# Altium PCB MB1364.PcbDoc
Units mil, origin at the board's own origin, x right, y up, seen from the top; angles counter-clockwise.
Board outline 2755.91 x 5249.61 mil, 2 copper layers (Top Layer, Bottom Layer), stack 48.437 mil thick; 40 components, 158 nets, 301 pads, 101 vias.
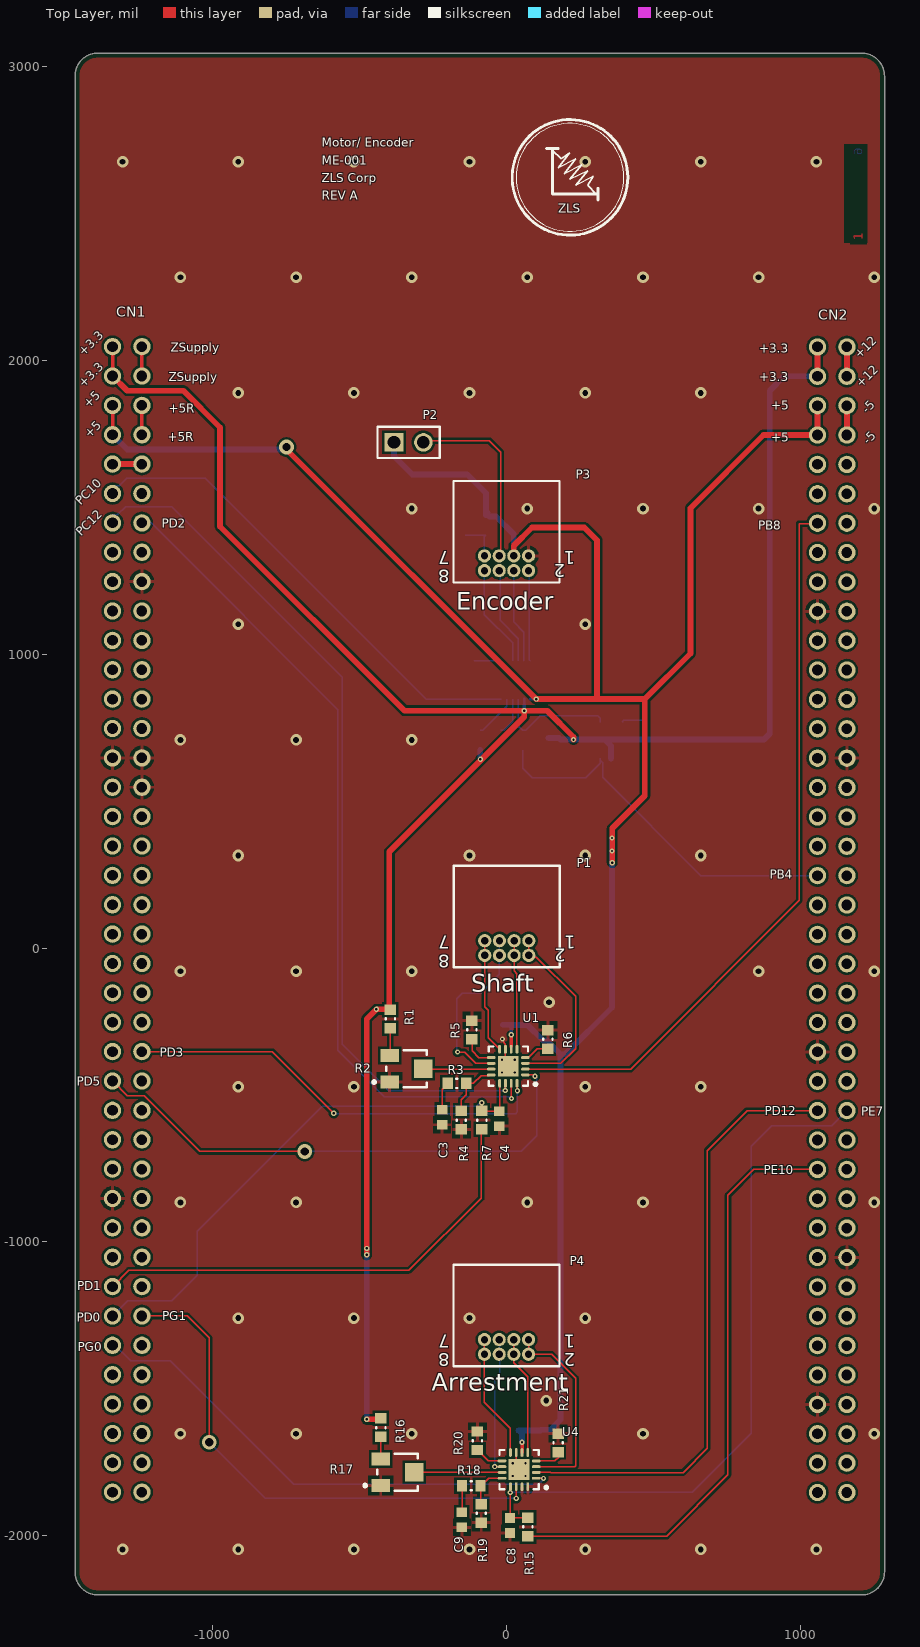
[diagram p0: Top Layer view]
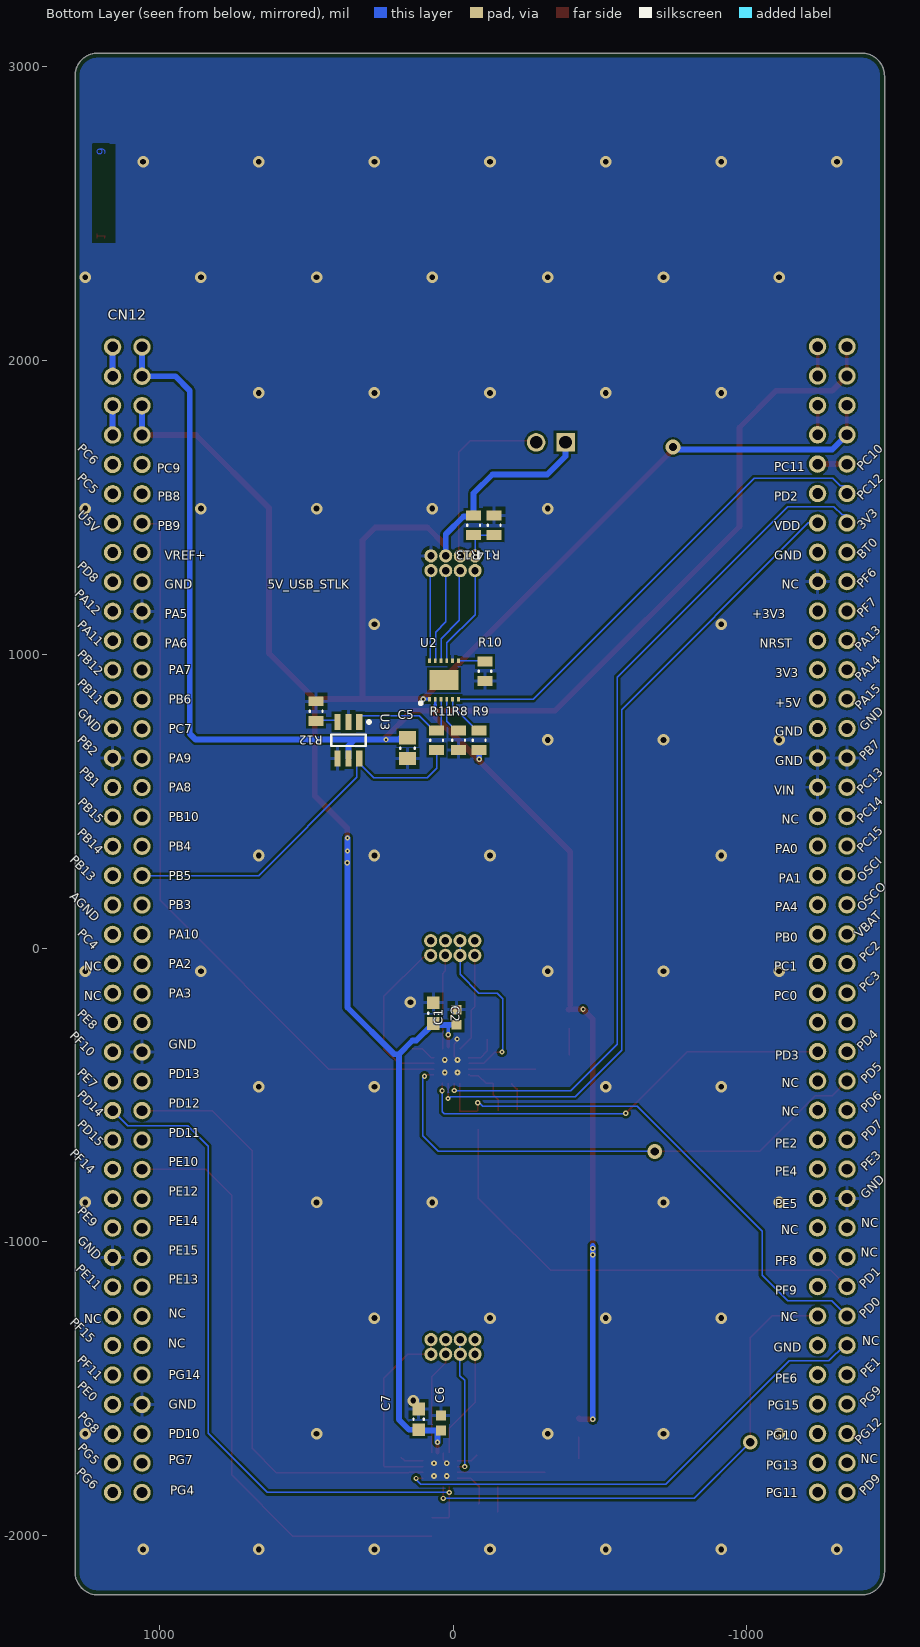
[diagram p1: Bottom Layer view, seen from below]

## Layer stack, top to bottom
Top Solder: solder mask 0.5909, Solder Resist, Dk 3.5
Top Layer: signal copper 1.6531
Dielectric 1: prepreg 3.9, FR-4, Dk 4.2
Dielectric 2: core 4, Dk 4.2
Dielectric 3: prepreg 37.2311, Dk 4.2
Bottom Layer: signal copper 1.6531
Bottom Solder: solder mask 0.5909, Solder Resist, Dk 3.5

## Board outline
-1469,-2123.26 ccw(c-1390.26,-2123.26) -1390.26,-2202 2.2,-2202 553.39,-2202 1208.16,-2202.01 ccw(c1208.16,-2123.26) 1286.9,-2123.26 1286.9,2968.87 ccw(c1208.16,2968.87) 1208.16,3047.61 -1390.26,3047.61 ccw(c-1390.26,2968.87) -1469,2968.87

## Design rules (kind name [scope] priority, off if disabled: settings)
BoardOutlineClearance [All] p1: gap=15.75 ignorepadtopadclearanceinfootprint=FALSE
Clearance [All] p1: gap=8 ignorepadtopadclearanceinfootprint=TRUE except(11.81: Arc-Fill Track-Fill SMDPad-Fill THPad-Fill Via-Fill Fill-Fill)
ComponentClearance [All] p1: gap=0 collisioncheckmode=3 verticalgap=0 showdistances=FALSE
FabricationTestPointUsage TestPointUsage [All] p1: valid=0 allowmultiple=FALSE
FabricationTestpoint Testpoint [(IsPad And (OnTopLayer Or OnBottomLayer))] p1: side=3 testpointundercomponent=TRUE minsize=40 maxsize=100 preferedsize=60 minholesize=0 maxholesize=40 preferedholesize=32 testpointgrid=1 allowsidetop=TRUE allowsidebottom=TRUE usegrid=TRUE gridtolerance=0.01
HoleSize [All] p1: absolutevalues=TRUE maxlimit=150 minlimit=1 maxpercent=80.000 minpercent=20.000
MinimumSolderMaskSliver [All] p1: minsoldermaskwidth=0
PolygonConnect PolygonConnect_10 [All vs IsNamedPolygon('USB_FS_VBUS_L01_P068')] p1: connectstyle=Direct reliefconductorwidth=10 reliefentries=4 polygonreliefangle="90 Angle" airgapwidth=10
PolygonConnect PolygonConnect_9 [All vs IsNamedPolygon('5V_L03_P060')] p2: connectstyle=Direct reliefconductorwidth=10 reliefentries=4 polygonreliefangle="90 Angle" airgapwidth=10
PolygonConnect PolygonConnect_8 [All vs IsNamedPolygon('5V_L01_P058')] p3: connectstyle=Direct reliefconductorwidth=10 reliefentries=4 polygonreliefangle="90 Angle" airgapwidth=10
PolygonConnect PolygonConnect_7 [All vs IsNamedPolygon('3V3_STLK_L04_P042')] p4: connectstyle=Direct reliefconductorwidth=10 reliefentries=4 polygonreliefangle="90 Angle" airgapwidth=10
PolygonConnect PolygonConnect_6 [All vs IsNamedPolygon('5V_USB_CHGR_L04_P040')] p5: connectstyle=Direct reliefconductorwidth=10 reliefentries=4 polygonreliefangle="90 Angle" airgapwidth=10
PolygonConnect PolygonConnect_5 [All vs IsNamedPolygon('5V_L01_P038')] p6: connectstyle=Direct reliefconductorwidth=10 reliefentries=4 polygonreliefangle="90 Angle" airgapwidth=10
PolygonConnect PolygonConnect_4 [All vs IsNamedPolygon('5V_L01_P038')] p7: thpad.connectstyle=Relief thpad.reliefconductorwidth=15.75 thpad.reliefentries=4 thpad.polygonreliefangle="90 Angle" thpad.airgapwidth=15.75 smdpad.connectstyle=Direct smdpad.reliefconductorwidth=10 smdpad.reliefentries=4 smdpad.polygonreliefangle="90 Angle" smdpad.airgapwidth=10 via.connectstyle=Direct via.reliefconductorwidth=10 via.reliefentries=4 via.polygonreliefangle="90 Angle" via.airgapwidth=10
PolygonConnect PolygonConnect_3 [All vs IsNamedPolygon('5V_VIN_L01_P028')] p8: connectstyle=Direct reliefconductorwidth=10 reliefentries=4 polygonreliefangle="90 Angle" airgapwidth=10
PolygonConnect PolygonConnect_2 [All vs IsNamedPolygon('3V3_L01_P026')] p9: connectstyle=Direct reliefconductorwidth=10 reliefentries=4 polygonreliefangle="90 Angle" airgapwidth=10
PolygonConnect PolygonConnect_1 [All vs IsNamedPolygon('GND_L01_P024')] p10: connectstyle=Direct reliefconductorwidth=10 reliefentries=4 polygonreliefangle="90 Angle" airgapwidth=10
PolygonConnect [All] p11: thpad.connectstyle=Relief thpad.reliefconductorwidth=11.81 thpad.reliefentries=4 thpad.polygonreliefangle="90 Angle" thpad.airgapwidth=11.81 smdpad.connectstyle=Relief smdpad.reliefconductorwidth=11.81 smdpad.reliefentries=4 smdpad.polygonreliefangle="90 Angle" smdpad.airgapwidth=11.81 via.connectstyle=Direct via.reliefconductorwidth=10 via.reliefentries=4 via.polygonreliefangle="90 Angle" via.airgapwidth=10
RoutingLayers RoutingLayers_USB_DIFF_90R [InDifferentialPairClass('DPC_USB_DIFF_90R')] p1: top layer_v5=TRUE bottom layer_v5=TRUE
RoutingLayers RoutingLayers_RXTX_DIFF_100R [InDifferentialPairClass('DPC_RXTX_DIFF_100R')] p2: top layer_v5=TRUE bottom layer_v5=TRUE
RoutingLayers RoutingLayers_RMII_SINGLE_50R [InNetClass('NC_RMII_SINGLE_50R')] p3: top layer_v5=TRUE bottom layer_v5=TRUE
RoutingVias RoutingVias_Default [All] p1: holewidth=7.87 width=17.72 viastyle="Through Hole" minholewidth=7.87 minwidth=17.72 maxholewidth=7.87 maxwidth=17.72
SilkToSilkClearance [All] p1: silktosilkclearance=4
SilkToSolderMaskClearance SilkscreenOverComponentPads [IsPad] p1: minsilkscreentomaskgap=4 clearancetoexposedcopper=TRUE
SolderMaskExpansion [All] p1: expansion=4
Width Width_RMII_SINGLE_50R [InNetClass('NC_RMII_SINGLE_50R')] p1: maxlimit=5 minlimit=5 preferedwidth=5 minimp=50.000000 maximp=50.000000 favimp=50.000000
Width Width_POWER_300u [InNetClass('NC_POWER_300u')] p2: maxlimit=393.7 minlimit=4.72 preferedwidth=11.81 minimp=50.000000 maximp=50.000000 favimp=50.000000
Width Width_GROUND [InNetClass('NC_GROUND')] p3: maxlimit=393.7 minlimit=4.72 preferedwidth=11.81 minimp=50.000000 maximp=50.000000 favimp=50.000000
Width Width_POWER_500u [InNetClass('NC_POWER_500u')] p4: maxlimit=393.7 minlimit=4.72 preferedwidth=19.68 minimp=50.000000 maximp=50.000000 favimp=50.000000
Width Width_POWER_SMPS [InNetClass('NC_POWER_SMPS')] p5: maxlimit=393.7 minlimit=4.72 preferedwidth=19.68 minimp=50.000000 maximp=50.000000 favimp=50.000000
Width Width_STLK_W200 [InNetClass('NC_STLK_W200-ISO200')] p6: maxlimit=393.7 minlimit=7.87 preferedwidth=7.87 minimp=50.000000 maximp=50.000000 favimp=50.000000
Width Width_USB_OPTION [InNetClass('NC_USB_DIFF_90R_OPTION')] p7: maxlimit=6.1 minlimit=6.1 preferedwidth=6.1 minimp=50.000000 maximp=50.000000 favimp=50.000000
Width [All] p8: maxlimit=393.7 minlimit=4.72 preferedwidth=4.72 minimp=50.000000 maximp=50.000000 favimp=50.000000
Width Width_RD_N [InNet('RD_N')] p9: maxlimit=4.33 minlimit=4.33 preferedwidth=4.33 minimp=50.000000 maximp=50.000000 favimp=50.000000
Width Width_TD_P [InNet('TD_P')] p10: maxlimit=4.33 minlimit=4.33 preferedwidth=4.33 minimp=50.000000 maximp=50.000000 favimp=50.000000
22 further rules are at their usual default settings.

## Classes and differential pairs
net class PH[0..1]: PH0 PH1
net class PG[0..15]: PG0 PG1 PG2 PG3 PG4 PG5 PG6 PG7 PG8 PG9 PG10 PG11 PG12 PG13 PG14 PG15
net class PF[0..15]: PF0 PF1 PF2 PF3 PF4 PF5 PF6 PF7 PF8 PF9 PF10 PF11 PF12 PF13 PF14 PF15
net class PE[0..15]: PE0 PE1 PE2 PE3 PE4 PE5 PE6 PE7 PE8 PE9 PE10 PE11 PE12 PE13 PE14 PE15
net class PD[0..15]: PD0 PD1 PD2 PD3 PD4 PD5 PD6 PD7 PD8 PD9 PD10 PD11 PD12 PD13 PD14 PD15
net class PC[0..15]: PC0 PC1 PC2 PC3 PC4 PC5 PC6 PC7 PC8 PC9 PC10 PC11 PC12 PC13 PC14 PC15
net class PB[0..15]: PB0 PB1 PB2 PB3 PB4 PB5 PB6 PB7 PB8 PB9 PB10 PB11 PB12 PB13 PB14 PB15
net class PA[0..15]: PA0 PA1 PA2 PA3 PA4 PA5 PA6 PA7 PA8 PA9 PA10 PA11 PA12 PA13 PA14 PA15
component class Motors: C1 C2 C3 C4 C6 C7 C8 C9 P1 P4 R1 R2 R3 R4 R5 R6 R7 R15 R16 R17 R18 R19 R20 R21 U1 U4
component class Connectors: CN1 CN2 HW1 HW2
component class Encoder: C5 P2 P3 R8 R9 R10 R11 R12 R13 R14 U2 U3

## Components (designator, comment, footprint, x,y, rotation, side; value= is the part's Value field where it differs from the comment)
C1 "0.1uF" CAPC1608X94X35LL15T15 -12,-235 r90 bottom
C2 "4.7uF" CAPC0603(1608)55_M 67,-221 r270 bottom
C3 "22nF" CAPC1608X94X35LL15T15 -219,-575.5 r270 top
C4 "0.1uF" CAPC1608X94X35LL15T15 -24,-580.5 r90 top
C5 "CAP CER 0.1UF 25V X7R 0805" CAPC0805(2012)145_N 155,681 r270 bottom
C6 "0.1uF" CAPC1608X94X35LL15T15 41,-1616 r90 bottom
C7 "4.7uF" CAPC0603(1608)55_M 117,-1604 r270 bottom
C8 "0.1uF" CAPC1608X94X35LL15T15 12,-1965 r90 top
C9 "22nF" CAPC1608X94X35LL15T15 -152,-1946 r270 top
CN1 "SSW-140-23-G-D" SSW-140-23-G-D -1291.2,97.96 r270 top locked
CN2 "SSW-140-23-G-D" SSW-140-23-G-D 1108.8,96.97 r270 top locked
P1 "SAMTEC-TFM-104-01-X-D-RAJ" SAMTEC-TFM-104-01-X-D-RA 1,153 r180 top locked
P2 "61300211121" 61300211121 -333,1722 r0 top
P3 "SAMTEC-TFM-104-01-X-D-RAJ" SAMTEC-TFM-104-01-X-D-RA 0,1463 r180 top locked
P4 "SAMTEC-TFM-104-01-X-D-RAJ" SAMTEC-TFM-104-01-X-D-RA 0,-1205 r180 top locked
R1 "0.1" RESC0603(1608)_N -395.5,-240.5 r90 top value="1020.00 Ohm"
R2 "3313J-1-503E" BOUR-3313J-1_V -340.5,-410.5 r0 top
R3 "1k" RESC0603(1608)_N -169,-460.5 r0 top value="1020.00 Ohm"
R4 "10k" RESC0603(1608)_N -154,-585.5 r90 top value="1020.00 Ohm"
R5 ".2" RESC0603(1608)_N -118,-278 r270 top value="1020.00 Ohm"
R6 ".2" RESC0603(1608)_N 141,-310.5 r270 top value="1020.00 Ohm"
R7 "0.1" RESC0603(1608)_N -84,-585.5 r270 top value="1020.00 Ohm"
R8 "10K" RESC0805(2012)_L -19,708 r270 bottom
R9 "10K" RESC0805(2012)_L -89,708 r270 bottom
R10 "10K" RESC0805(2012)_L -109,943 r270 bottom
R11 "DNP" RESC0805(2012)_L 56,708 r270 bottom
R12 "43.2K" RESC0805(2012)_L 466,807 r90 bottom
R13 "DNP" RESC0805(2012)_L -70,1440 r270 bottom
R14 "DNP" RESC0805(2012)_L -140,1440 r270 bottom
R15 "0.1" RESC0603(1608)_N 73,-1970 r270 top value="1020.00 Ohm"
R16 "0.1" RESC0603(1608)_N -428,-1632 r90 top value="1020.00 Ohm"
R17 "3313J-1-503E" BOUR-3313J-1_V -371,-1784 r0 top
R18 "1k" RESC0603(1608)_N -120,-1830 r0 top value="1020.00 Ohm"
R19 "10k" RESC0603(1608)_N -86,-1924 r90 top value="1020.00 Ohm"
R20 ".2" RESC0603(1608)_N -99,-1677 r270 top value="1020.00 Ohm"
R21 ".2" RESC0603(1608)_N 176,-1684 r270 top value="1020.00 Ohm"
U1 "STSPIN220" STSPIN220-QFN127P600-8N 6.16,-401.84 r180 top
U2 "MAX22502EATC+T" MAX22502EATC+T 31,913 r90 bottom
U3 "LTC6994MPS6-2#TRMPBF" LTC6994MPS6-2#TRMPBF 356,708 r270 bottom locked
U4 "STSPIN220" STSPIN220-QFN127P600-8N 43,-1775 r180 top

## Footprints (in the part's own frame and the unit in brackets; to place one, negate y for a bottom-side part, rotate by r counter-clockwise, add the part's x,y. Pads: shape width x height; smd on the part's side, far side on the other; paste and mask are expansions set on the pad)
61300211121 [mm] "Pin Header, pitch 2.54 mm, THT, Vertical, single row, 2p"
  rect 1.6x1.6 hole 1.1: 1(-1.27,0)
  round 1.6 hole 1.1: 2(1.27,0)
  silkscreen extent -2.69,-1.35 2.69,1.35, body extent -2.54,-1.27 2.54,1.27, height 8.57
BOUR-3313J-1_V [mm] "SMD, 3-Leads, Body 3.5x3.2mm, Pitch 1.15mm"
  rect 1.6x1.1 smd paste+0: 1(-1.45,-1.15) 3(-1.45,1.15)
  rect 1.6x1.6 smd paste+0: 2(1.45,0)
  silkscreen extent -2.92,-1.6 1.75,1.6, body extent -1.75,-1.65 1.75,1.65, height 2.11
CAPC0603(1608)55_M [mm] "Chip Capacitor, Body 1.6x0.8mm, Height 0.55mm, IPC Low Density"
  rect 1.1x1.1 smd: 1(-0.9,0) 2(0.9,0)
  silkscreen extent -0.05,-0.45 0.05,0.45, body extent -0.87,-0.47 0.88,0.48, height 0.55
CAPC0805(2012)145_N [mm] "Chip Capacitor, Body 2.0x1.2mm, Height 1.45mm, IPC Medium Density"
  rect 1.15x1.45 smd: 1(-0.9,0) 2(0.9,0)
  silkscreen extent -0.05,-0.62 0.05,0.63, body extent -1.1,-0.72 1.1,0.73, height 1.45
CAPC1608X94X35LL15T15 [mm]
  rect 0.85x0.9 smd: 1(-0.65,0) 2(0.65,0)
  body extent -0.88,-0.48 0.87,0.48, height 0.94
LTC6994MPS6-2#TRMPBF [mm] "SOT23, 6-Leads, Body 2.90x3.23mm, Pitch 0.95mm, IPC Medium Density"
  rect 1.4x0.55 smd: 1(-1.575,0.95) 2(-1.575,0) 3(-1.575,-0.95) 4(1.575,-0.95) 5(1.575,0) 6(1.575,0.95)
  silkscreen extent -1.7,-1.5 0.5,1.9, body extent -1.92,-1.5 1.93,1.5, height 1
MAX22502EATC+T [mm]
  rect 0.4x0.25 smd: 1(-1.65,1.25) 2(-1.65,0.75) 3(-1.65,0.25) 4(-1.65,-0.25) 5(-1.65,-0.75) 6(-1.65,-1.25) 7(1.65,-1.25) 8(1.65,-0.75) 9(1.65,-0.25) 10(1.65,0.25) 11(1.65,0.75) 12(1.65,1.25)
  rect 1.7x2.5 smd: 13(0,0)
  silkscreen extent -2.12,1.88 -1.88,2.12, body extent -1.6,-1.55 1.6,1.55, height 0.8
RESC0603(1608)_N [mm] "Chip Resistor, Body 1.6x0.8mm, IPC Medium Density"
  rect 0.9x1 smd: 1(-0.8,0) 2(0.8,0)
  silkscreen extent -0.05,-0.4 0.05,0.4, body extent -0.85,-0.47 0.85,0.47, height 0.6
RESC0805(2012)_L [mm] "Chip Resistor, Body 2.0x1.3mm, IPC High Density"
  rect 0.85x1.3 smd: 1(-0.85,0) 2(0.85,0)
  silkscreen extent -0.05,-0.55 0.05,0.55, body extent -1.1,-0.67 1.1,0.68, height 0.7
SAMTEC-TFM-104-01-X-D-RA [mil]
  round 45 hole 25: 1(-75,127.48) 2(-75,177.48) 3(-25,127.48) 4(-25,177.48) 5(25,127.48) 6(25,177.48) 7(75,127.48) 8(75,177.48)
  silkscreen extent -180,-128 180,218, body extent -165,-110 160,177, height 222
SSW-140-23-G-D [mm]
  round 1.5 hole 0.92: 1(-49.53,-1.27) 2(-49.53,1.27) 3(-46.99,-1.27) 4(-46.99,1.27) 5(-44.45,-1.27) 6(-44.45,1.27) 7(-41.91,-1.27) 8(-41.91,1.27) 9(-39.37,-1.27) 10(-39.37,1.27) 11(-36.83,-1.27) 12(-36.83,1.27) 13(-34.29,-1.27) 14(-34.29,1.27) 15(-31.75,-1.27) 16(-31.75,1.27) 17(-29.21,-1.27) 18(-29.21,1.27) 19(-26.67,-1.27) 20(-26.67,1.27) 21(-24.13,-1.27) 22(-24.13,1.27) 23(-21.59,-1.27) 24(-21.59,1.27) 25(-19.05,-1.27) 26(-19.05,1.27) 27(-16.51,-1.27) 28(-16.51,1.27) 29(-13.97,-1.27) 30(-13.97,1.27) 31(-11.43,-1.27) 32(-11.43,1.27) 33(-8.89,-1.27) 34(-8.89,1.27) 35(-6.35,-1.27) 36(-6.35,1.27) 37(-3.81,-1.27) 38(-3.81,1.27) 39(-1.27,-1.27) 40(-1.27,1.27) 41(1.27,-1.27) 42(1.27,1.27) 43(3.81,-1.27) 44(3.81,1.27) 45(6.35,-1.27) 46(6.35,1.27) 47(8.89,-1.27) 48(8.89,1.27) 49(11.43,-1.27) 50(11.43,1.27) 51(13.97,-1.27) 52(13.97,1.27) 53(16.51,-1.27) 54(16.51,1.27) 55(19.05,-1.27) 56(19.05,1.27) 57(21.59,-1.27) 58(21.59,1.27) 59(24.13,-1.27) 60(24.13,1.27) 61(26.67,-1.27) 62(26.67,1.27) 63(29.21,-1.27) 64(29.21,1.27) 65(31.75,-1.27) 66(31.75,1.27) 67(34.29,-1.27) 68(34.29,1.27) 69(36.83,-1.27) 70(36.83,1.27) 71(39.37,-1.27) 72(39.37,1.27) 73(41.91,-1.27) 74(41.91,1.27) 75(44.45,-1.27) 76(44.45,1.27) 77(46.99,-1.27) 78(46.99,1.27) 79(49.53,-1.27) 80(49.53,1.27)
  body extent -51.05,-2.48 51.05,2.48, height 8.51
STSPIN220-QFN127P600-8N [mm]
  oval 0.75x0.25 smd: 1(-1.475,0.75) 2(-1.475,0.25) 3(-1.475,-0.25) 4(-1.475,-0.75) 9(1.475,-0.75) 10(1.475,-0.25) 11(1.475,0.25) 12(1.475,0.75)
  oval 0.25x0.75 smd: 5(-0.75,-1.475) 6(-0.25,-1.475) 7(0.25,-1.475) 8(0.75,-1.475) 13(0.75,1.475) 14(0.25,1.475) 15(-0.25,1.475) 16(-0.75,1.475)
  rect 1.8x1.8 smd: 17(0,0)
  silkscreen extent -2.48,-1.7 1.7,1.7, body extent -1.6,-1.6 1.6,1.6, height 1

## Part data
C1 C3 C4 C6 C8 C9: library part CMP-1661-00001-2, "CAP .1UF 16V CERAMIC X7R 0603", Capacitance=1uF, Case/Package=0603, Case Code (Metric)=1608, Dielectric=X7R, Manufacturer=Yageo, Manufacturer Part Number=CC0603KRX7R7BB105, Max Operating Temperature=125°C, Min Operating Temperature=-55°C, Package Quantity=1, Supplier Part Number 1=311-1446-6-ND, Tolerance=10%, Voltage=16V, Case Code (Imperial)=0603, ComponentLink1Description=Datasheet, ComponentLink1URL=http://datasheets.avx.com/X7RDielectric.pdf, ComponentLink2Description=http://www.yageo.com/documents/recent/UPY-GPHC_X7R_6.3V-to-50V_18.pdf, ComponentLink2URL=http://www.yageo.com/documents/recent/UPY-GPHC_X7R_6.3V-to-50V_18.pdf, ComponentLink3Description=http://www.yageo.com/documents/recent/UPY-GPHC_X7R_6.3V-to-50V_8.pdf, ComponentLink3URL=http://www.yageo.com/documents/recent/UPY-GPHC_X7R_6.3V-to-50V_8.pdf, ComponentLink4Description=http://www.farnell.com/datasheets/1734573.pdf, ComponentLink4URL=http://www.farnell.com/datasheets/1734573.pdf, ComponentLink5Description=http://www.farnell.com/datasheets/1489800.pdf, ComponentLink5URL=http://www.farnell.com/datasheets/1489800.pdf, Composition=Ceramic, Depth=0.8mm, Dissipation Factor=5%, Halogen Free="Halogen Free", Height=0.8mm, Lead Free="Lead Free", Length=1.6mm, Mount="Surface Mount", Number of Pins=2, Packaging="Tape and Reel", Pricing 1="1=0.21, 10=0.143, 100=0.0727, 500=0.04974, 1000=0.044 (USD)", Radiation Hardening=No, REACH SVHC=Unknown, Stock 1=5506121, Supplier 1=Digi-Key, Termination=SMD/SMT, Thickness=0.035inch, Voltage Rating=16V, Voltage Rating (DC)=16V, Width=0.031inch
C2 C7: library part CMP-1035-02779-1, "CAP 4.7uF 6.3V ±10% 0603 (1608 Metric) Thickness 0.55mm SMD", Case-EIA=0603, Case-Metric=1608, Dielectric=X5R, Dielectric Material=Ceramic, Manufacturer=KEMET, Manufacturer Part Number=C0603C475K9PACTU, Max Operating Temperature=85°C, Min Operating Temperature=-55°C, Package Quantity=1, Rated Voltage="6.3 V", Supplier Part Number 1=399-3482-6-ND, Tolerance=±10%, Voltage=6.3V, Capacitance=4.7uF, Case/Package=0603, Case Code (Imperial)=0603, Case Code (Metric)=1608, ComponentLink1Description=https://api.kemet.com/component-edge/download/datasheet/C0603C475K9PACTU.pdf, ComponentLink1URL=https://api.kemet.com/component-edge/download/datasheet/C0603C475K9PACTU.pdf, ComponentLink2Description=http://www.farnell.com/datasheets/1732700.pdf, ComponentLink2URL=http://www.farnell.com/datasheets/1732700.pdf, ComponentLink3Description=http://www.farnell.com/datasheets/1789732.pdf, ComponentLink3URL=http://www.farnell.com/datasheets/1789732.pdf, ComponentLink4Description=http://www.farnell.com/datasheets/40889.pdf, ComponentLink4URL=http://www.farnell.com/datasheets/40889.pdf, Contact Plating=Matte,Tin, Depth=0.8mm, Dissipation Factor=5%, Height=0.8mm, Lead Free="Lead Free", Lead Pitch=0.7mm, Length=1.6mm, Max Thickness="0.55 mm", Mount="PCB,Surface Mount", Number of Pins=2, Packaging="Tape and Reel", Pricing 1="1=0.21, 10=0.15, 100=0.0706, 500=0.04952, 1000=0.041 (USD)", Radiation Hardening=No, REACH SVHC="No SVHC", Stock 1=1765509, Supplier 1=Digi-Key, Technology=SMT, Termination=SMD/SMT, Thickness=0.035inch, Voltage Rating=6.3V, Voltage Rating (DC)=6.3V, Width=0.031inch
C5: library part CMP-1036-04795-1, Capacitance=0.1µF, Manufacturer="Murata Electronics North America", Manufacturer Part Number=GRM21BR71E104KA01L, Operating Temperature="-55°C ~ 125°C", Package / Case="0805 (2012 Metric)", Ratings=-, Supplier Part Number 1=490-1673-6-ND, Temperature Coefficient=X7R, Tolerance=±10%, Voltage - Rated=25V, Applications="General Purpose", Category=Capacitors, ComponentLink1Description=http://www.murata.com/~/media/webrenewal/support/library/catalog/products/capacitor/mlcc/c02e.ashx, ComponentLink1URL=http://www.murata.com/~/media/webrenewal/support/library/catalog/products/capacitor/mlcc/c02e.ashx, Features=-, Height - Seated (Max)=-, Lead Spacing=-, Lead Style=-, Mounting Type="Surface Mount, MLCC", Packaging=Digi-Reel®, Part Status=Active, Pricing 1="1=0.2, 10=0.145, 100=0.0683, 500=0.04788, 1000=0.03964 (USD)", RoHS="RoHS Compliant", Size / Dimension="0.079\" L x 0.049\" W (2.00mm x 1.25mm)", Stock 1=891652, Supplier 1=Digi-Key, Thickness (Max)="0.053\" (1.35mm)"
CN1 CN2: "80 Position Receptacle Connector Through Hole", Manufacturer=Samtec, ComponentLink1Description=http://www.samtec.com/documents/webfiles/pdf/SSQ_TH.PDF?src-supplier=Avnet, ComponentLink1URL=http://www.samtec.com/documents/webfiles/pdf/SSQ_TH.PDF?src-supplier=Avnet, Contact Plating=Gold, Gender=Female, Manufacturer Part Number=SSW-140-23-G-D, Mount="Through Hole", Number of Contacts=80, Number of Rows=2, Packaging=Bulk, Pitch=2.54mm, Pricing 1="1=13.99000, 10=13.29000, 25=12.59000, 50=12.09000, 100=11.29000 (USD)", Radiation Hardening=No, RoHS=Yes, Stock 1=0, Supplier 1=Avnet, Supplier Part Number 1=SSW-140-23-G-D, Termination=Solder
P2: library part CMP-1502-01060-1, "THT Vertical Pin Header WR-PHD, Pitch 2.54 mm, Single Row, 2 pins", Contact Resistance=20mOhm, Manufacturer="Wurth Elektronik", Operating Temperature=-40to105degC, Rated Current=3A, Withstanding Voltage=500VAC, Working Voltage=250VAC, Datasheet URL=https://katalog.we-online.de/em/datasheet/6130xx11121.pdf, Gender=Male, Manufacturer URL=http://www.we-online.de, Mounting Technology=THT, Orientation=Vertical, Package Reference=61300211121, Packaging=Bag, Part Number=61300211121, Pin Number=2, Pitch=2.54mm, Publisher=WurthElektronik, Row Number=Single
R1 R3 R4 R5 R6 R7 R15 R16 R18 R19 R20 R21: library part CMP-1012-00511-1, "0R12 0.1W 1% 0603 (1608 Metric)  SMD", Case-EIA=0603, Case-Metric=1608, Manufacturer=Vishay, Manufacturer Part Number=CRCW060310K0FKEA, Max Operating Temperature=155°C, Max Power Dissipation=100mW, Min Operating Temperature=-55°C, Package Quantity=10, Power="0.1 W", Resistance=10kR, Supplier Part Number 1=311-0.0GRDKR-ND, Temperature Coefficient=100ppm/°C, Tolerance="1 %", Voltage Rating=75V, Case/Package=0603, Case Code (Imperial)=0603, Case Code (Metric)=1608, ComponentLink1Description=http://www.vishay.com/docs/20008/dcrcw.pdf, ComponentLink1URL=http://www.vishay.com/docs/20008/dcrcw.pdf, ComponentLink2Description=https://www.verical.com/server-webapp/html/getDatasheet?partID=86831, ComponentLink2URL=https://www.verical.com/server-webapp/html/getDatasheet?partID=86831, ComponentLink3Description=http://www.farnell.com/datasheets/2310790.pdf, ComponentLink3URL=http://www.farnell.com/datasheets/2310790.pdf, ComponentLink4Description=http://www.vishay.com/docs/20035/dcrcwe3.pdf, ComponentLink4URL=http://www.vishay.com/docs/20035/dcrcwe3.pdf, ComponentLink5Description=http://www.farnell.com/datasheets/2111203.pdf, ComponentLink5URL=http://www.farnell.com/datasheets/2111203.pdf, ComponentLink6Description=http://uk.rs-online.com/webdocs/0d98/0900766b80d98afc.pdf, ComponentLink6URL=http://uk.rs-online.com/webdocs/0d98/0900766b80d98afc.pdf, Composition="Thick Film", Contact Plating=Lead,Tin, Depth=0.85mm, Features="Automotive AEC-Q200", Height=0.45mm, Lead Free="Lead Free", Length=1.55mm, Military Standard=Not, Number of Pins=2, Number of Terminations=2, Packaging="Tape and Reel", Power Rating=100mW, Pricing 1="1=0.1, 10=0.021, 25=0.0152, 50=0.0114, 100=0.0084, 250=0.00644, 500=0.00514, 1000=0.00379 (USD)", Radiation Hardening=No, REACH SVHC=Unknown, Stock 1=49641653, Supplier 1=Digi-Key, Technology=SMT, Termination=SMD/SMT, Voltage Rating (DC)=75V, Weight=7.1E-05oz, Width=0.033inch
R2 R17: library part CMP-2000-05588-1, "3 mm Trimpot(R) Trimming Potentiometer, 50 KOhm, +/- 20%, 0.125 W, -55 to 125 degC, 3-Pin SMD, RoHS, Tape and Reel", Manufacturer=Bourns, Package Description="3-Pin Surface Mount Device, Body 3.5 x 3.2 mm, Pitch 1.15 mm", Package Reference=3313J-1, Power Rating=125mW, Resistance Tolerance=±20%, Temperature Coefficient=±150ppm/°C, Track Resistance=50kohm, Datasheet URL=http://www.bourns.com/docs/Product-Datasheets/3313.pdf, Datasheet Version=05/2016, Manufacturer URL=http://www.bourns.com/, Mounting Technology=SurfaceMount, No. of Turns=1, Potentiometer Mounting=SMD, SVHC=NoSVHC(19-Dec-2012)
R8 R9 R10: library part CMP-1013-00215-1, "RES SMD 10K OHM 1% 1/8W 0805", Manufacturer="Vishay Dale", Manufacturer Part Number=CRCW080510K0FKEA, Operating Temperature="-55°C ~ 155°C", Package / Case="0805 (2012 Metric)", Power (Watts)="0.125W, 1/8W", Supplier Device Package=0805, Supplier Part Number 1=541-10.0KCCT-ND, Temperature Coefficient=±100ppm/°C, Tolerance=±1%, Category=Resistors, ComponentLink1Description=http://www.vishay.com/docs/20035/dcrcwe3.pdf, ComponentLink1URL=http://www.vishay.com/docs/20035/dcrcwe3.pdf, Composition="Thick Film", Failure Rate=-, Features="Automotive AEC-Q200", Height - Seated (Max)="0.020\" (0.50mm)", Packaging="Cut Tape (CT)", Part Status=Active, Pricing 1="1=0.1, 10=0.055, 100=0.0223, 1000=0.01003, 2500=0.0087 (USD)", RoHS="RoHS Compliant", Size / Dimension="0.079\" L x 0.049\" W (2.00mm x 1.25mm)", Stock 1=1104982, Supplier 1=Digi-Key
R11 R13 R14: library part CMP-1013-00215-1, "RES SMD 0 OHM 5% 1/8W 0805"
R12: library part CMP-1013-00215-1, "RES SMD 43.2K OHM 1% 1/8W 0805", Manufacturer="Vishay Dale", Manufacturer Part Number=CRCW080543K2FKEA, Operating Temperature="-55°C ~ 155°C", Package / Case="0805 (2012 Metric)", Power (Watts)="0.125W, 1/8W", Supplier Device Package=0805, Supplier Part Number 1=541-43.2KCCT-ND, Temperature Coefficient=±100ppm/°C, Tolerance=±1%, Category=Resistors, ComponentLink1Description=http://www.vishay.com/docs/20035/dcrcwe3.pdf, ComponentLink1URL=http://www.vishay.com/docs/20035/dcrcwe3.pdf, Composition="Thick Film", Failure Rate=-, Features="Automotive AEC-Q200", Height - Seated (Max)="0.020\" (0.50mm)", Packaging="Cut Tape (CT)", Part Status=Active, Pricing 1="1=0.1, 10=0.055, 100=0.0223, 1000=0.01003, 2500=0.0087 (USD)", RoHS="RoHS Compliant", Size / Dimension="0.079\" L x 0.049\" W (2.00mm x 1.25mm)", Stock 1=68577, Supplier 1=Digi-Key
U3: Base Part Number=LTC6994, Manufacturer="Linear Technology/Analog Devices", Manufacturer Part Number=LTC6994CS6-2#TRMPBF, Operating Temperature="0°C ~ 70°C", Package / Case="SOT-23-6 Thin, TSOT-23-6", Supplier Device Package=TSOT-23-6, Supplier Part Number 1=LTC6994CS6-2#TRMPBFCT-ND, Voltage - Supply="2.25 V ~ 5.5 V", Available Total Delays="1µs ~ 33.6s", Category="Integrated Circuits (ICs)", ComponentLink1Description=http://www.linear.com/docs/29725, ComponentLink1URL=http://www.linear.com/docs/29725, Delay to 1st Tap=-, Function=Programmable, Mounting Type="Surface Mount", Packaging="Cut Tape (CT)", Part Status=Active, Pricing 1="1=3.42, 25=3.0496, 100=1.9217, 250=1.76156 (USD)", RoHS="RoHS Compliant", Stock 1=1401, Supplier 1=Digi-Key

## Via types
v1: diameter 39.37/39.37 (per signal layer), hole 19.68, Top Layer to Bottom Layer, 65 vias
v2: diameter 17.72, hole 7.87, Top Layer to Bottom Layer, tented both sides, 25 vias
v3: diameter 19.68, hole 7.87, Top Layer to Bottom Layer, 8 vias
v4: diameter 50, hole 28, Top Layer to Bottom Layer, 3 vias

## Nets (pads, with @x,y where several pads share a name; then routed paths per layer and width w, separated by ;. In a path a pad name is that pad's centre, name@x,y a point inside that pad or via, vN(x,y) a via of type N, cw(c..) or ccw(c..) an arc to the next point about the centre after c; other vN are vias at no path point)
3V3: CN1.26
5V_USB_STLK: CN2.18
+3.3: C5.1 CN1.1 CN1.3 CN2.1 CN2.3 R1.2 R9.2 R16.2 U2.2 U3.5 | length 7567.3
  Top Layer w12: CN1.3 CN1.1
  Top Layer w19.68: CN1.3 -1291.25,1898 -1100,1898 -975,1773 -975,1436 -347.47,808.47 v2(60.53,808.47) 138.53,808.47 228,719 v2(228,710) ; v2(-476,-1604) -431.5,-1604 R16.2 ; v2(-476,-1044) v2(-476,-1022) -476,-241 v2(-443,-208) -396.5,-208 R1.2 R1.2@-393.53,-209.01 ; R1.2@-399,-193.65 -399,328.12 60.53,787.65 v2@60.53,803 ; CN2.3 CN2.1
  Bottom Layer w9.84: 60.53,828.47 U2.2
  Bottom Layer w12: v2(60.53,808.47) 60.53,828.47
  Bottom Layer w19.68: v2(-476,-1604) v2(-476,-1044) v2(-476,-1022) v2@-476,-1014 ; v2(-89,643) R9.2 ; C5.1@143,716 178.43,716 184.43,710 v2(228,710) 335,710 356,689 U3.5 ; 337,710 875.88,710 896,730.12 896,1898 944.97,1946.97 CN2.3 CN2.1
+5: C1.1 C2.2 C6.1 C7.2 CN1.5 CN1.7 CN2.5 CN2.7 P2.1 P3.3 R13.1 U1.6 U2.1 U4.6 | length 8566.8
  Top Layer w12: CN1.7 CN1.5 ; U1.6@16,-335.01 v2(16,-295) ; U4.6 52.84,-1682.16 v2(53,-1682)
  Top Layer w19.68: v4@-749,1698 v2(101,848) 308,848 ; P3.3 25,1370 87,1432 265,1432 308,1389 308,848 ; v2(360,291) 360,408 471,519 471,848 ; CN2.5 CN2.7 874.97,1746.97 626,1498 626,1003 471,848 ; 308,848 471,848
  Bottom Layer w5: 11.62,-260.59 13,-261.97 16,-264.97
  Bottom Layer w9.84: U2.1 v2@100.94,848.02
  Bottom Layer w12: v2(16,-295) 16,-264.97
  Bottom Layer w19.68: CN1.7 -1291.25,1698 v4@-749,1698 ; P2.1 -383,1675 -321,1613 -134,1613 -70.01,1549.01 -70.01,1475.03 -63.57,1481.46 -63.57,1475.89 -57.68,1470 -36.07,1470 25,1408.93 25,1342.53 P3.3@17.99,1335.52 ; C1.1 11.62,-260.59 ; 13,-261.97 72.54,-261.97 125.19,-314.62 137.62,-314.62 184,-361 ; v2(53,-1682) 53,-1653.59 C6.1 114.84,-1641.59 C7.2 149.57,-1639.43 184,-1605 184,-361 ; v2(101,848) v2@100.96,848.04 ; v2(359,375) 359,-202.31 200.31,-361 184,-361 ; CN2.7 CN2.5
  other v2: 359,331
  other v4: -749,1706
+5R: CN1.6 CN1.8 | length 100
  Top Layer w12: CN1.8 CN1.6
+12: CN2.2 CN2.4 | length 200
  Top Layer w19.68: CN2.4 CN2.2
  Bottom Layer w19.68: CN2.4 CN2.2
-5: CN2.6 CN2.8 | length 200
  Top Layer w19.68: CN2.8 CN2.6
  Bottom Layer w19.68: CN2.8 CN2.6
AGND: CN2.42
ARRESTMENT_OUT1+: P4.1 P4.2 U4.3 | length 677.1
  Top Layer w5: P4.1 P4.2 153.48,-1382.48 235,-1464 235,-1762.23 232.23,-1765 101.23,-1765 U4.3
ARRESTMENT_OUT1-: P4.3 P4.4 U4.5 | length 409.5
  Top Layer w5: P4.3@38,-1332.48 25,-1345.48 25,-1412 72.53,-1459.53 U4.5
ARRESTMENT_OUT2+: P4.5 P4.6 U4.10 | length 453.1
  Top Layer w5: v2(-39.68,-1765) -15.23,-1765 U4.10
  Bottom Layer w5: v2(-39.68,-1765) -39.68,-1471.68 -23,-1455 P4.5@-23,-1343.48
ARRESTMENT_OUT2-: P4.7 P4.8 U4.8 | length 427.3
  Top Layer w5: P4.7@-62,-1332.48 -76,-1346.48 -76,-1545 13.47,-1634.47 U4.8
Batt: CN1.9 CN1.10 | length 100
  Top Layer w19.68: CN1.9 CN1.10
BOOT0: CN1.15
CLK+: P3.6 U2.10 | length 336.1
  Bottom Layer w5: P3.6@-22,1288.01 -22,1116 40.84,1053.16 U2.10
CLK-: P3.8 U2.9 | length 347.4
  Bottom Layer w5: P3.8 -75,1136 21.16,1039.84 U2.9
Direction: P3.7 R13.2 R14.2 | length 143.1
  Bottom Layer w5: R14.2 R13.2 -75,1401.54 P3.7
DTA+: P3.4 U2.11 | length 322.7
  Bottom Layer w5: P3.4@24,1285.52 24,1111 59,1076 59,979.49 U2.11
DTA-: P3.2 U2.12 | length 302.6
  Bottom Layer w5: P3.2@74,1278 77.65,1274.35 77.65,980.52 U2.12
GND: C1.2 C2.1 C3.2 C4.1 C5.2 C6.2 C7.1 C8.1 C9.2 CN1.18 CN1.29 CN1.30 CN1.32 CN1.59 CN2.19 CN2.30 CN2.49 CN2.64 CN2.73 P3.1 R2.1 R4.1 R5.1 R6.1 R8.2 R10.2 R12.2 R14.1 R17.1 R19.1 R20.1 R21.1 U1.7 U1.17 U2.8 U3.2 U3.4 U4.7 U4.15 U4.16 U4.17 | length 121.7
  Top Layer w5: v3(-15.5,-380.19) -3.68,-368.38 U1.7 -3.68,-326.32 -11.51,-318.49 -11.51,-311.49 v2(-14,-309) ; v3(21.35,-1753.35) 33.16,-1741.54 U4.7
  other v1: -1307.06,-2046.7 -913.35,-2046.7 -519.65,-2046.7 -125.95,-2046.7 267.75,-2046.7 661.45,-2046.7 1055.15,-2046.7 -1110.2,-1653 -716.5,-1653 -322.8,-1653 464.6,-1653 1252,-1653 135,-1540 -913.35,-1259.3 -519.65,-1259.3 -125.95,-1259.3 267.75,-1259.3 -1110.2,-865.6 -716.5,-865.6 70.9,-865.6 464.6,-865.6 1252,-865.6 -913.35,-471.9 -519.65,-471.9 267.75,-471.9 661.45,-471.9 145,-184 -1110.2,-78.2 -716.5,-78.2 -322.8,-78.2 858.3,-78.2 1252,-78.2 -913.35,315.5 -125.95,315.5 267.75,315.5 661.45,315.5 -1110.2,709.2 -716.5,709.2 -322.8,709.2 -913.35,1102.91 267.75,1102.91 -322.8,1496.61 70.9,1496.61 464.6,1496.61 858.3,1496.61 1252,1496.61 -913.35,1890.31 -519.65,1890.31 -125.95,1890.31 267.75,1890.31 661.45,1890.31 -1110.2,2284.01 -716.5,2284.01 -322.8,2284.01 70.9,2284.01 464.6,2284.01 858.3,2284.01 1252,2284.01 -1307.06,2677.71 -913.35,2677.71 -519.65,2677.71 -125.95,2677.71 267.75,2677.71 661.45,2677.71 1055.15,2677.71
  other v3: 21.35,-1796.65 64.65,-1796.65 64.65,-1753.35 -15.5,-423.5 27.81,-423.5 27.81,-380.19
IOREF: CN1.22
NetC3_1: C3.1 R3.1 | length 97.3
  Top Layer w5: C3.1 -219,-480.59 -216.23,-477.83 -215.85,-477.83 -200.5,-462.47 R3.1
NetC9_1: C9.1 R18.1 | length 87.6
  Top Layer w5: C9.1 -151.5,-1919.91 R18.1@-151.5,-1833
NetR1_1: R1.1 R2.3 | length 97
  Top Layer w5: R2.3 -395.5,-363.14 R1.1 R1.1@-397.58,-274.09
NetR2_2: R2.2 U1.11 | length 230.3
  Top Layer w5: R2.2@-282.23,-411.69 U1.11
NetR3_2: R3.2 R4.2 U1.12 | length 198
  Top Layer w5: R4.2 -154,-515.5 -137.5,-499.01 R3.2 -113.5,-460.5 -86.73,-433.73 -59.11,-433.73 -56.74,-431.37 U1.12
NetR5_2: R5.2 U1.9 | length 114.7
  Top Layer w5: R5.2 -116.03,-311.46 -116.03,-349.97 -93.68,-372.32 U1.9
NetR6_2: R6.2 U1.4 | length 87.4
  Top Layer w5: U1.4 74.07,-372.32 104.39,-342 R6.2@139.03,-342
NetR8_1: R8.1 U2.4 | length 128.4
  Bottom Layer w5: R8.1 -10.14,741.46 21.16,772.76 U2.4
NetR9_1: R9.1 U2.5 | length 149.2
  Bottom Layer w5: R9.1 -80.14,741.46 1.47,823.08 U2.5
NetR10_1: R10.1 U2.7 | length 91.4
  Bottom Layer w5: R10.1 -107.5,977.96 U2.7
NetR12_1: R12.1 U3.3 | length 85.3
  Bottom Layer w5: U3.3 399.86,776.46 R12.1@476,776.46
NetR16_1: R16.1 R17.3 | length 75.3
  Top Layer w5: R17.3 -428,-1738.64 R16.1
NetR17_2: R17.2 U4.11 | length 299.2
  Top Layer w5: R17.2 -313.07,-1784.84 U4.11
NetR18_2: R18.2 R19.2 U4.12 | length 148.8
  Top Layer w5: R18.2 R18.2@-88.5,-1833 ; R19.2 -88.5,-1890 R18.2@-88.5,-1833 ; U4.12 -60.03,-1804.53 R18.2@-88.5,-1833
NetR20_2: R20.2 U4.9 | length 76.6
  Top Layer w5: R20.2@-83,-1724.5 -62.02,-1745.47 U4.9
NetR21_2: R21.2 U4.4 | length 81.6
  Top Layer w5: U4.4 165.03,-1745.47 R21.2@177.5,-1733
NRST: CN1.24
PA0: CN1.38
PA1: CN1.40
PA2: CN2.45
PA3: CN2.47
PA4: CN1.42
PA5: CN2.21
PA6: CN2.23
PA7: CN2.25
PA8: CN2.33
PA9: CN2.31
PA10: CN2.43
PA11: CN2.24
PA12: CN2.22
PA13: CN1.23
PA14: CN1.25
PA15: CN1.27
PB0: CN1.44
PB1: CN2.34
PB2: CN2.32
PB3: CN2.41
PB4: CN2.37 R11.2 U3.6 | length 1306.1
  Bottom Layer w5: R11.2 56,612 87,581 270.34,581 318.6,629.26 U3.6@318.6,639.31 ; U3.6 U3.6@318.6,639.31 ; CN2.37 661.98,246.97 327.06,581.89 327.06,630.85 U3.6@318.6,639.31
PB5: CN2.39
PB6: CN2.27
PB7: CN1.31
PB8: CN2.13 U1.2 | length 2515
  Top Layer w5: U1.2 422.31,-411.69 996.4,162.4 996.4,1445 CN2.13@1058.8,1445
PB9: CN2.15
PB10: CN2.35
PB11: CN2.28
PB12: CN2.26
PB13: CN2.40
PB14: CN2.38
PB15: CN2.36
PC0: CN1.48
PC1: CN1.46
PC2: CN1.45
PC3: CN1.47
PC4: CN2.44
PC5: CN2.16
PC6: CN2.14
PC7: CN2.29
PC9: CN2.11
PC10: CN1.11 U2.6 | length 1645.2
  Bottom Layer w5: CN1.11@-1341.47,1574.81 -1318.44,1574.81 -1293.25,1600 -1025,1600 -273.04,848.04 U2.6
PC11: CN1.12
PC12: CN1.13 U1.14 | length 2929.1
  Top Layer w5: v2@-3.84,-484.35 -3.84,-460.07 U1.14
  Bottom Layer w5: CN1.13@-1341.47,1474.81 -1324.44,1474.81 -1296.25,1503 -1139,1503 -559,923 -559,-327 -401.5,-484.5 v2(-4,-484.5)
PC13: CN1.33
PC14: CN1.35
PC15: CN1.37
PD0: C4.2 CN1.67 R7.1 U1.13 | length 1828.2
  Top Layer w5: R7.1 v2(-84,-526.45) ; R7.1@-83.09,-554.91 C4.2 -23.37,-554.28 U1.13
  Bottom Layer w5: CN1.67 -1290.16,-1201 -1139,-1201 -1052,-1114 -1052,-962.84 -627.16,-538 -101.5,-538 -89.94,-526.45 v2(-84,-526.45)
PD1: CN1.65 R7.2 | length 1615.9
  Top Layer w5: CN1.65 -1286.16,-1097 -332,-1097 -85.97,-850.97 -85.97,-617 R7.2
PD2: CN1.14 U1.15 | length 2797.5
  Top Layer w5: v2@16,-510.5 16.5,-510 16.5,-460.41 U1.15
  Bottom Layer w5: CN1.14@-1241.2,1448 -1210,1448 -574,812 -574,-347 -416,-505 8.18,-505 v2@14.68,-511.5
  other v2: 17,-511.5
PD3: CN1.50 U1.16 | length 1463.2
  Top Layer w5: CN1.50 -797.96,-352.04 v2(-588,-562) ; U1.16 36.34,-460.57 v2@36.34,-484.85
  Bottom Layer w5: v2@-586.66,-563.34 30.66,-563.34 37,-557 v2(37,-485.5)
PD4: CN1.49
PD5: CN1.51 U1.1 | length 1805.4
  Top Layer w5: CN1.51 -1291.25,-502 -1234,-502 -1044,-692 v4(-687,-692) ; U1.1@64.77,-430.83 65.3,-431.37 88.85,-431.37 93.48,-436 v2(97,-436)
  Bottom Layer w5: v4(-687,-692) 50,-692 103,-639 103,-442 v2(97,-436)
PD6: CN1.53
PD7: CN1.55
PD8: CN2.20
PD9: CN1.79
PD10: CN2.75
PD11: CN2.55
PD12: CN2.53 U4.2 | length 2062.1
  Top Layer w5: U4.2 150.84,-1784.84 151,-1785 601,-1785 683,-1703 683,-689 818.97,-553.03 CN2.53
PD13: CN2.51
PD14: CN2.56
PE0: CN2.74
PE1: CN1.71
PE2: CN1.56
PE3: CN1.57
PE4: CN1.58
PE5: CN1.60
PE6: CN1.72
PE7: C8.2 CN2.54 R15.1 U4.13 | length 2422.7
  Top Layer w5: C8.2 72.09,-1939.41 R15.1 ; C8.2@13.47,-1937.45 13,-1936.97 v2(13,-1853) 13,-1833.54 U4.13
  Bottom Layer w5: v2(13,-1853) 632,-1853 833,-1652 833,-675 903,-605 1106.82,-605 CN2.54
PE8: CN2.50
PE10: CN2.57 R15.2 | length 2060.6
  Top Layer w5: R15.2 545.5,-2001.5 754,-1793 754,-841 841.97,-753.03 CN2.57
PE11: CN2.66
PE12: CN2.59
PE13: CN2.65
PE14: CN2.61
PE15: CN2.63
PF0: CN1.63
PF1: CN1.61
PF2: CN1.62
PF3: CN2.68
PF4: CN2.48
PF5: CN2.46
PF6: CN1.19
PF7: CN1.21
PF8: CN1.64
PF9: CN1.66
PF10: CN2.52
PF11: CN2.72
PF12: CN2.69
PF13: CN2.67
PF14: CN2.60
PF15: CN2.70
PG0: CN1.69 U4.1 | length 1685.8
  Top Layer w5: U4.1 125.2,-1804.53 v2(125.68,-1805)
  Bottom Layer w5: CN1.69@-1332.96,-1352.04 -1280,-1405 -1145,-1405 -725,-1825 110.13,-1825 v2@125.68,-1809.45
PG1: CN1.68 U4.14 | length 1779.9
  Top Layer w5: CN1.68 -1086.96,-1252.04 -1012,-1327 v4(-1012,-1682) ; v2@32,-1873 33.16,-1871.84 U4.14
  Bottom Layer w5: v4(-1012,-1682) -821,-1873 v2(33.15,-1873)
PG2: CN1.52
PG3: CN1.54
PG4: CN2.79
PG5: CN2.78
PG6: CN2.80
PG7: CN2.77
PG8: CN2.76
PG9: CN1.73
PG10: CN1.76
PG11: CN1.80
PG12: CN1.75
PG13: CN1.78
PG14: CN2.71
PG15: CN1.74
PH0: CN1.39
PH1: CN1.41
Preset: P2.2 P3.5 | length 638.6
  Top Layer w5: P2.2@-289,1728 -59,1728 -20,1689 P3.5@-20,1335.52
SHAFT_OUT1+: P1.1 P1.2 U1.3 | length 636.3
  Top Layer w5: U1.3 185,-392 235,-342 235,-164 101.94,-30.94 82.46,-30.94 P1.2 P1.1
SHAFT_OUT1-: P1.3 P1.4 U1.5 | length 373.3
  Top Layer w5: P1.3 P1.4 26,-77 35.69,-86.69 U1.5
SHAFT_OUT2+: P1.5 P1.6 U1.10 | length 605.6
  Top Layer w5: v2(-166.5,-353.5) -142.48,-353.5 -104.99,-390.99 U1.10@-66.39,-390.99 ; U1.10@-66.35,-391.02 U1.10@-52.89,-391.02
  Bottom Layer w5: v2(-166.5,-353.5) -169,-351 -169,-172 -150,-153 -88,-153 -24,-89 P1.6 P1.5
SHAFT_OUT2-: P1.7 P1.8 U1.8 | length 390.3
  Top Layer w5: P1.7 P1.8 -74,-199 -62,-211 -62,-305.14 U1.8
SPI1_MISO_DELAY: R11.1 U2.3 U3.1 | length 413.9
  Bottom Layer w5: U2.3 40.84,755.83 55.21,741.46 R11.1 64.86,741.46 115.39,792 310.13,792 318.6,783.54 U3.1
VBAT: CN1.43
VIN: CN1.34
ZSupply: CN1.2 CN1.4 | length 100
  Top Layer w12: CN1.4 CN1.2
pads on no net: CN1.16 CN1.17 CN1.20 CN1.28 CN1.36 CN1.70 CN1.77 CN2.9 CN2.10 CN2.12 CN2.17 CN2.58 CN2.62 U2.13

## Polygon pours and split planes (outlines as drawn)
GND on Bottom Layer "GND_L02_P050" (solid, remove dead copper, pour order 50): -76.54,-2198.89 638.91,-2198.89 638.91,-2199.88 640.88,-2198.89 1229.46,-2198.89 1281.63,-2146.73 1281.63,2988.11 1226.51,3043.23 -1398.49,3044.22 -1409.32,3044.22 -1467.39,2986.14 -1467.39,-2137.87 -1406.36,-2198.89
GND on Top Layer "GND_L01_P114" (solid, remove dead copper, pour order 114): -1407.05,3047.61 -1464.57,2990.09 -1464.58,2035.37 -1464.57,-2137.87 -1405.52,-2196.92 9.31,-2196.92 8.84,-2197.26 1217.35,-2202 1281.49,-2137.87 1281.49,2005.83 1202.75,2005.83 1281.49,2005.83 1281.49,2990.09 1223.96,3047.61

## Other copper
Top Layer:
  text "1" at 1213.28,2410.78 h29.53 r90
Bottom Layer:
  text "6" at 1213.28,2725.74 h29.53 r90
Multi-Layer:
  pour cut-out: 1149.58,2401.58 1228.32,2401.58 1228.32,2736.23 1149.58,2736.23

## Silkscreen, mask and mechanical layers (free items; w line width, h text height)
Top Overlay:
  circle w3.94: c216.17,2624.23 r183.58
  circle w10: c216.17,2624.23 r196.85
  lines w5: 156.18,2717.23 186.18,2687.23 216.18,2707.23 176.18,2657.23 236.18,2687.23 196.18,2637.23 256.18,2667.23 216.18,2617.23 276.18,2647.23 236.18,2597.23 296.18,2627.23 276.18,2597.23 306.18,2567.23
  lines w10: 136.18,2722.23 176.18,2722.23 ; 156.18,2717.23 156.18,2567.23 306.18,2567.23 ; 311.18,2547.23 311.18,2587.23
  text "Motor/ Encoder" at -629,2728 h29.53
  text "ME-001" at -629,2668 h29.53
  text "ZLS Corp" at -629,2608 h29.53
  text "REV A" at -629,2548 h29.53
  text "ZLS" at 176.17,2504.23 h29.53
  text "ZSupply" at -1143,2030 h29.53
  text "+3.3" at 860,2027 h29.53
  text "+3.3" at -1439,2014 h29.53 r45
  text "+12" at 1202.75,2005.83 h29.53 r45
  text "ZSupply" at -1150,1930 h29.53
  text "+3.3" at 861,1930 h29.53
  text "+3.3" at -1440,1907 h29.53 r45
  text "+12" at 1207,1907 h29.53 r45
  text "+5" at -1422,1837 h29.53 r45
  text "+5" at 900.59,1833.9 h29.53
  text "+5R" at -1150,1823 h29.53
  text "-5" at 1229,1817 h29.53 r45
  text "+5" at -1419,1735 h29.53 r45
  text "+5R" at -1154,1726 h29.53
  text "+5" at 900.59,1723.9 h29.53
  text "-5" at 1231,1713 h29.53 r45
  text "PC10" at -1449,1507 h29.53 r45
  text "PD2" at -1174.41,1430.9 h29.53
  text "PB8" at 856.59,1423.9 h29.53
  text "PC12" at -1448,1401 h29.53 r45
  text "Encoder" at -171,1152 h60
  text "PB4" at 896.59,235.9 h29.53
  text "Shaft" at -120,-148 h60
  text "PD3" at -1180.41,-369.1 h29.53
  text "PD5" at -1462.41,-469.1 h29.53
  text "PD12" at 879,-568 h29.53
  text "PE7" at 1208,-571 h29.53
  text "PE10" at 875,-769 h29.53
  text "PD1" at -1461.41,-1165.1 h29.53
  text "PG1" at -1172.41,-1267.1 h29.53
  text "PD0" at -1463,-1272 h29.53
  text "PG0" at -1460,-1372 h29.53
  text "Arrestment" at -255,-1507 h60
Bottom Overlay:
  text "CN12" at 1176,2128 h59.06
  text "PC6" at 1281,1698 h29.53 r45
  text "PC10" at -1394,1623 h29.53 r315
  text "PC11" at -1094,1623 h29.53
  text "PC9" at 1007,1618 h29.53
  text "PC5" at 1281,1598 h29.53 r45
  text "PC12" at -1394,1523 h29.53 r315
  text "PD2" at -1094,1523 h29.53
  text "PB8" at 1006,1523 h29.53
  text "U5V" at 1281,1473 h29.53 r45
  text "3V3" at -1394,1423 h29.53 r315
  text "VDD" at -1094,1423 h29.53
  text "PB9" at 1006,1423 h29.53
  text "BT0" at -1394,1323 h29.53 r315
  text "GND" at -1094,1323 h29.53
  text "VREF+" at 981,1323 h29.53
  text "PD8" at 1281,1298 h29.53 r45
  text "PF6" at -1394,1223 h29.53 r315
  text "NC" at -1119,1223 h29.53
  text "5V_USB_STLK" at 631,1223 h29.53
  text "GND" at 981,1223 h29.53
  text "PA12" at 1289,1203 h29.53 r45
  text "PF7" at -1394,1123 h29.53 r315
  text "+3V3" at -1019,1123 h29.53
  text "PA5" at 981,1123 h29.53
  text "PA11" at 1281,1098 h29.53 r45
  text "E5V" at -1594,1048 h29.53
  text "NRST" at -1044,1023 h29.53
  text "PA6" at 981,1023 h29.53
  text "PA13" at -1386.2,1006.96 h29.53 r315
  text "PB12" at 1281,998 h29.53 r45
  text "PA7" at 967.8,931.96 h29.53
  text "3V3" at -1096.2,921.96 h29.53
  text "PA14" at -1386.2,905.96 h29.53 r315
  text "PB11" at 1281,898 h29.53 r45
  text "PB6" at 967.8,831.96 h29.53
  text "+5V" at -1096.2,819.96 h29.53
  text "PA15" at -1386.2,807.96 h29.53 r315
  text "GND" at 1281,798 h29.53 r45
  text "GND" at -1402.2,736.96 h29.53 r315
  text "PC7" at 967.8,731.96 h29.53
  text "GND" at -1096.2,722.96 h29.53
  text "PB2" at 1280.8,705.96 h29.53 r45
  text "PB7" at -1402.2,636.96 h29.53 r315
  text "PA9" at 967.8,631.96 h29.53
  text "GND" at -1096.2,622.96 h29.53
  text "PB1" at 1274.8,598.96 h29.53 r45
  text "PA8" at 967.8,531.96 h29.53
  text "PC13" at -1394,523 h29.53 r315
  text "VIN" at -1094,523 h29.53
  text "PB15" at 1278.8,492.96 h29.53 r45
  text "PB10" at 967.8,431.96 h29.53
  text "PC14" at -1394,423 h29.53 r315
  text "NC" at -1119,423 h29.53
  text "PB14" at 1280.8,389.96 h29.53 r45
  text "PB4" at 967.8,331.96 h29.53
  text "PA0" at -1096.2,323.96 h29.53
  text "PC15" at -1394,323 h29.53 r315
  text "PB13" at 1306,298 h29.53 r45
  text "PB5" at 967.8,231.96 h29.53
  text "OSCI" at -1394,223 h29.53 r315
  text "PA1" at -1108.2,221.96 h29.53
  text "AGND" at 1306,173 h29.53 r45
  text "PB3" at 967.8,131.96 h29.53
  text "PA4" at -1096.19,125.96 h29.53
  text "OSCO" at -1394,123 h29.53 r315
  text "PC4" at 1281,48 h29.53 r45
  text "VBAT" at -1386.2,32.96 h29.53 r315
  text "PA10" at 967.8,31.96 h29.53
  text "PB0" at -1096.2,21.96 h29.53
  text "PC2" at -1402.2,-49.04 h29.53 r315
  text "PA2" at 967.8,-68.04 h29.53
  text "PC1" at -1094,-77 h29.53
  text "NC" at 1256,-77 h29.53
  text "PC3" at -1402.2,-151.04 h29.53 r315
  text "PA3" at 967.8,-168.04 h29.53
  text "PC0" at -1094,-177 h29.53
  text "NC" at 1256,-177 h29.53
  text "PE8" at 1281,-227 h29.53 r45
  text "PF10" at 1306,-302 h29.53 r45
  text "GND" at 967.8,-343.04 h29.53
  text "PD4" at -1394,-352 h29.53 r315
  text "PD3" at -1096.2,-380.04 h29.53
  text "PE7" at 1281,-427 h29.53 r45
  text "PD13" at 967.8,-443.04 h29.53
  text "PD5" at -1406.2,-463.04 h29.53 r315
  text "NC" at -1119.71,-473.58 h29.53
  text "PD14" at 1281,-502 h29.53 r45
  text "PD12" at 967.8,-543.04 h29.53
  text "PD6" at -1406.2,-562.04 h29.53 r315
  text "NC" at -1118.72,-571.02 h29.53
  text "PD15" at 1281,-602 h29.53 r45
  text "PD11" at 967.8,-643.04 h29.53
  text "PD7" at -1408.2,-659.04 h29.53 r315
  text "PE2" at -1096.2,-679.04 h29.53
  text "PF14" at 1306,-702 h29.53 r45
  text "PE10" at 967.8,-743.04 h29.53
  text "PE3" at -1407.2,-761.04 h29.53 r315
  text "PE4" at -1096.19,-774.04 h29.53
  text "PE12" at 967.8,-843.04 h29.53
  text "GND" at -1405.2,-857.04 h29.53 r315
  text "PE5" at -1096.2,-885.04 h29.53
  text "PE9" at 1281.8,-899.04 h29.53 r45
  text "PE14" at 967.8,-943.04 h29.53
  text "NC" at -1390.6,-950.61 h29.53
  text "NC" at -1116.76,-973.58 h29.53
  text "GND" at 1281.8,-998.04 h29.53 r45
  text "PE15" at 967.8,-1043.04 h29.53
  text "NC" at -1388.63,-1051.01 h29.53
  text "PF8" at -1096.2,-1079.04 h29.53
  text "PE11" at 1286.8,-1095.04 h29.53 r45
  text "PE13" at 967.8,-1143.04 h29.53
  text "PD1" at -1402.2,-1161.04 h29.53 r315
  text "PF9" at -1096.2,-1179.04 h29.53
  text "NC" at 966.99,-1258.78 h29.53
  text "PD0" at -1402.2,-1263.04 h29.53 r315
  text "NC" at -1115.77,-1270.82 h29.53
  text "NC" at 1256,-1277 h29.53
  text "PF15" at 1306,-1277 h29.53 r45
  text "NC" at -1392.57,-1351.2 h29.53
  text "NC" at 968.96,-1360.15 h29.53
  text "GND" at -1092.15,-1374.17 h29.53
  text "PF11" at 1280.8,-1405.04 h29.53 r45
  text "PE1" at -1405.2,-1464.04 h29.53 r315
  text "PG14" at 967.8,-1468.04 h29.53
  text "PE6" at -1096.2,-1480.04 h29.53
  text "PE0" at 1281.8,-1493.04 h29.53 r45
  text "PG9" at -1404.2,-1566.04 h29.53 r315
  text "GND" at 967.8,-1568.04 h29.53
  text "PG15" at -1071.13,-1572.16 h29.53
  text "PG8" at 1279.8,-1597.04 h29.53 r45
  text "PD10" at 967.8,-1668.04 h29.53
  text "PG10" at -1067.04,-1674.04 h29.53
  text "PG12" at -1386.2,-1693.04 h29.53 r315
  text "PG5" at 1279.8,-1704.33 h29.53 r45
  text "NC" at -1388.63,-1752.78 h29.53
  text "PG7" at 968.33,-1756.96 h29.53
  text "PG13" at -1067.04,-1775.04 h29.53
  text "PG6" at 1284.8,-1788.04 h29.53 r45
  text "PG4" at 963.06,-1861.14 h29.53
  text "PD9" at -1402.2,-1866.04 h29.53 r315
  text "PG11" at -1067.04,-1870.04 h29.53
Top Solder:
  region: 1228.32,2401.58 1228.32,2736.23 1149.58,2736.23 1149.58,2401.58
Bottom Solder:
  region: 1228.32,2401.58 1228.32,2736.23 1149.58,2736.23 1149.58,2401.58

## Dimensions
-1390.26,-2202 to -1319,3048 on M2-Board Dimensions
-1469,2968.87 to 1286.9,2968.87 on M2-Board Dimensions

## Text inside footprints (layer, text, board x,y; h text height)
P1: Top Overlay "1" at 235.17,57.49 h77.5 r180; Top Overlay "2" at 201,13 h77.5 r180; Top Overlay "7" at -192.62,57.49 h77.5 r180; Top Overlay "8" at -192.62,-6.49 h77.5 r180; Mechanical 40 "5.588" at 434.5,158 h15.5 r180; Mechanical 40 "1.270" at 361.98,5.52 h15.5 r180; Mechanical 40 "1.270" at 179.5,-102 h15.5 r180; Mechanical 40 "8.255" at 26.98,428 h15.5 r180; Mechanical 40 "3.810" at 26.98,-142 h15.5 r180; M16-Top Courtyard "1" at 235.17,57.49 h77.5 r180; M16-Top Courtyard "2" at 235.17,-6.49 h77.5 r180; M16-Top Courtyard "7" at -192.62,57.49 h77.5 r180; M16-Top Courtyard "8" at -192.62,-6.49 h77.5 r180
P3: Top Overlay "8" at -193.62,1303.51 h77.5 r180; Top Overlay "7" at -193.62,1367.49 h77.5 r180; Top Overlay "2" at 200,1323 h77.5 r180; Top Overlay "1" at 234.17,1367.49 h77.5 r180; Mechanical 40 "3.810" at 25.98,1168 h15.5 r180; Mechanical 40 "8.255" at 25.98,1738 h15.5 r180; Mechanical 40 "1.270" at 178.5,1208 h15.5 r180; Mechanical 40 "1.270" at 360.98,1315.52 h15.5 r180; Mechanical 40 "5.588" at 433.5,1468 h15.5 r180; M16-Top Courtyard "8" at -193.62,1303.51 h77.5 r180; M16-Top Courtyard "7" at -193.62,1367.49 h77.5 r180; M16-Top Courtyard "2" at 234.17,1303.51 h77.5 r180; M16-Top Courtyard "1" at 234.17,1367.49 h77.5 r180
P4: Top Overlay "8" at -193.62,-1364.49 h77.5 r180; Top Overlay "7" at -193.62,-1300.51 h77.5 r180; Top Overlay "2" at 234.17,-1364.49 h77.5 r180; Top Overlay "1" at 234.17,-1300.51 h77.5 r180; Mechanical 40 "3.810" at 25.98,-1500 h15.5 r180; Mechanical 40 "8.255" at 25.98,-930 h15.5 r180; Mechanical 40 "1.270" at 178.5,-1460 h15.5 r180; Mechanical 40 "1.270" at 360.98,-1352.48 h15.5 r180; Mechanical 40 "5.588" at 433.5,-1200 h15.5 r180; M16-Top Courtyard "8" at -193.62,-1364.49 h77.5 r180; M16-Top Courtyard "7" at -193.62,-1300.51 h77.5 r180; M16-Top Courtyard "2" at 234.17,-1364.49 h77.5 r180; M16-Top Courtyard "1" at 234.17,-1300.51 h77.5 r180